# Altium PCB Copy of CFD_Chip_Test_v1_noLevelShifting.PcbDoc
Units mil, origin at the board's own origin, x right, y up, seen from the top; angles counter-clockwise.
Board outline 2960 x 2835 mil, 2 copper layers (Top Layer, Bottom Layer); 72 components, 49 nets, 279 pads, 82 vias.
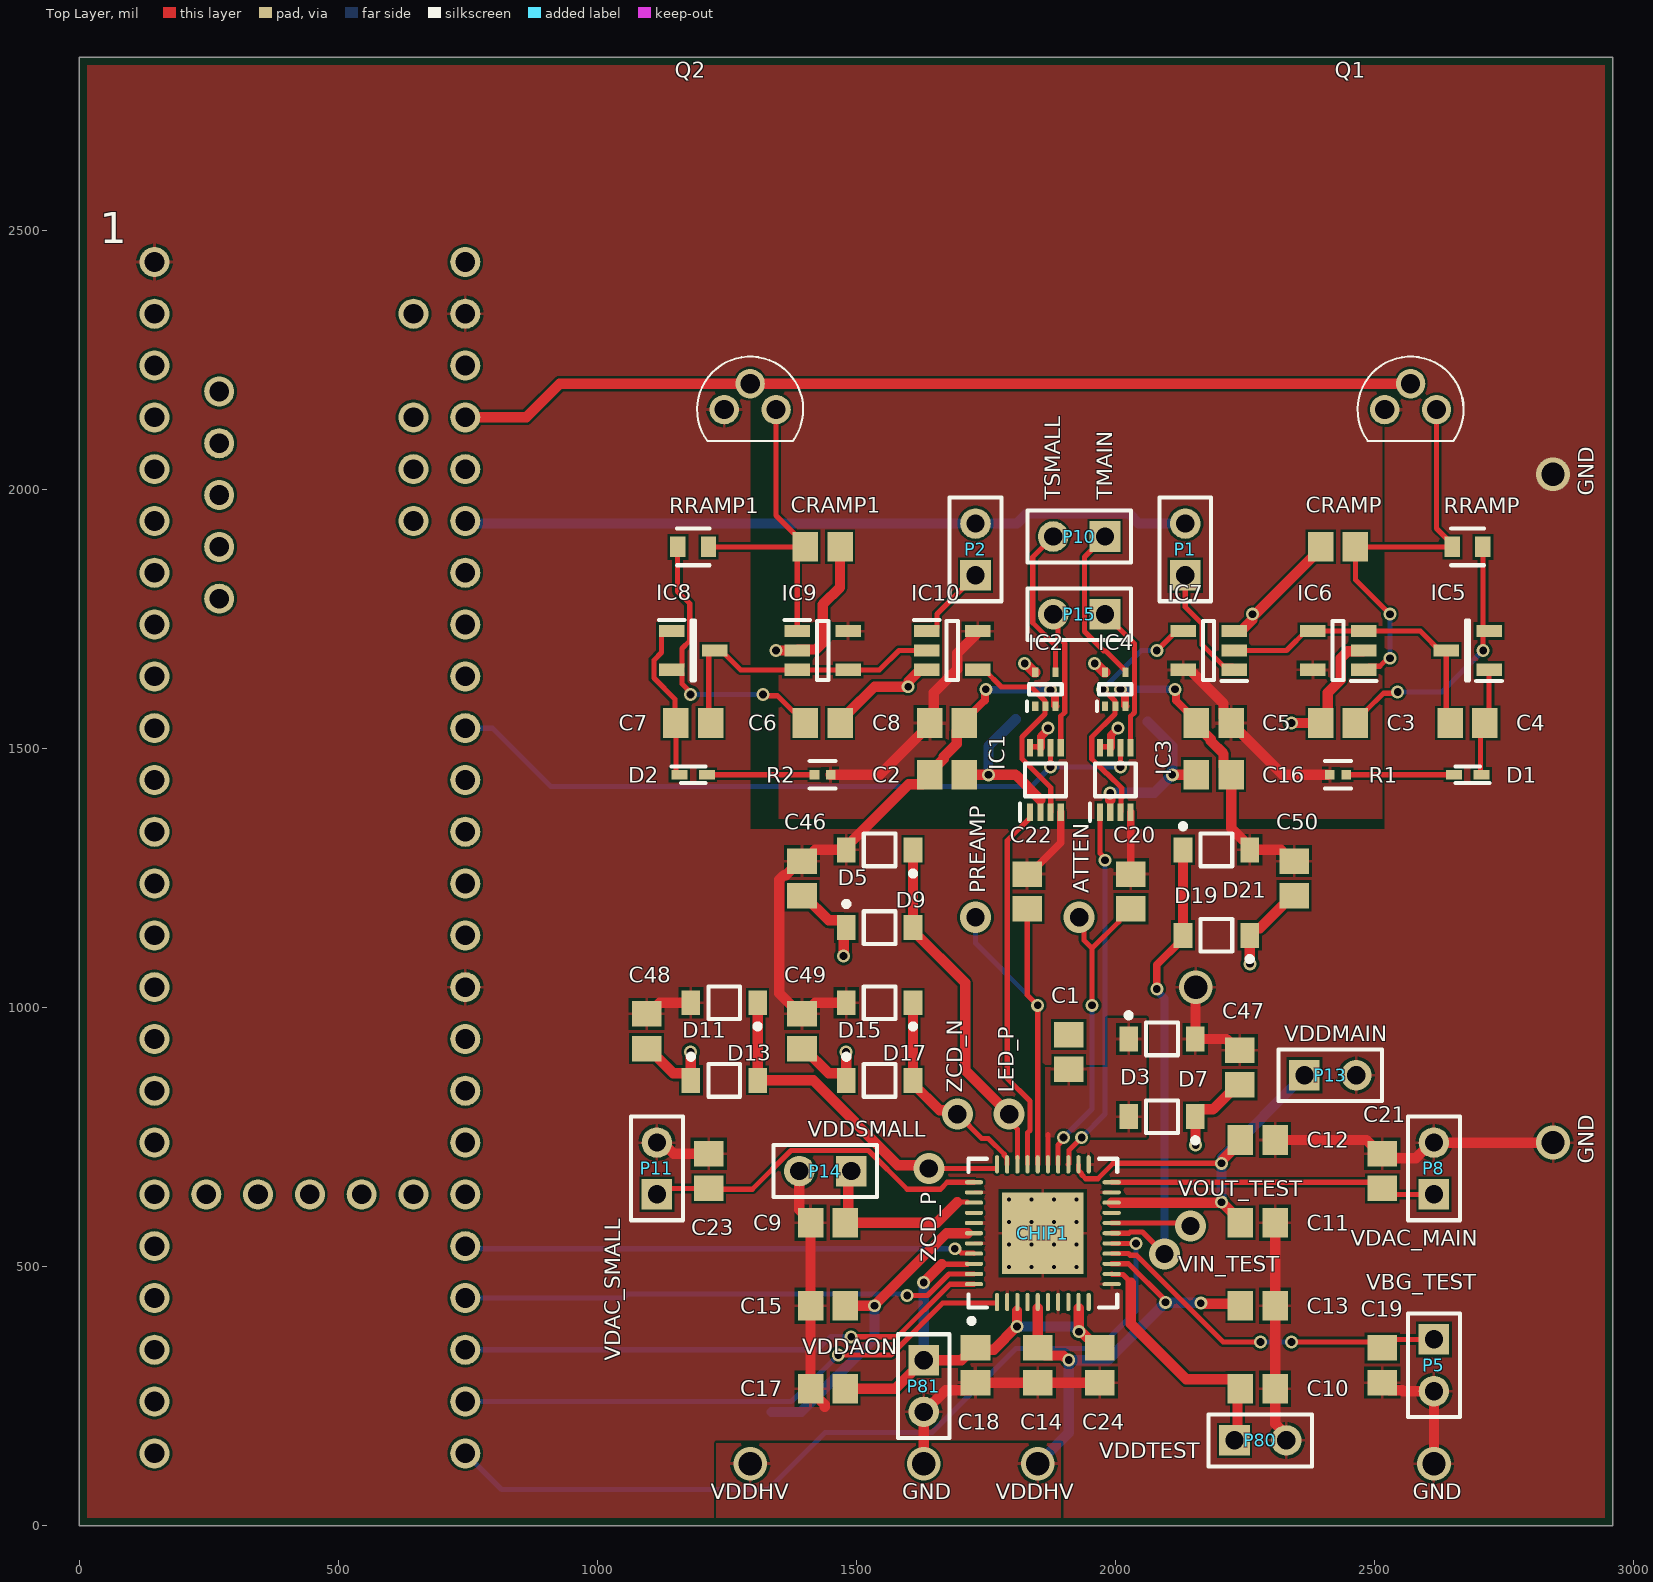
[diagram p0: Top Layer view]
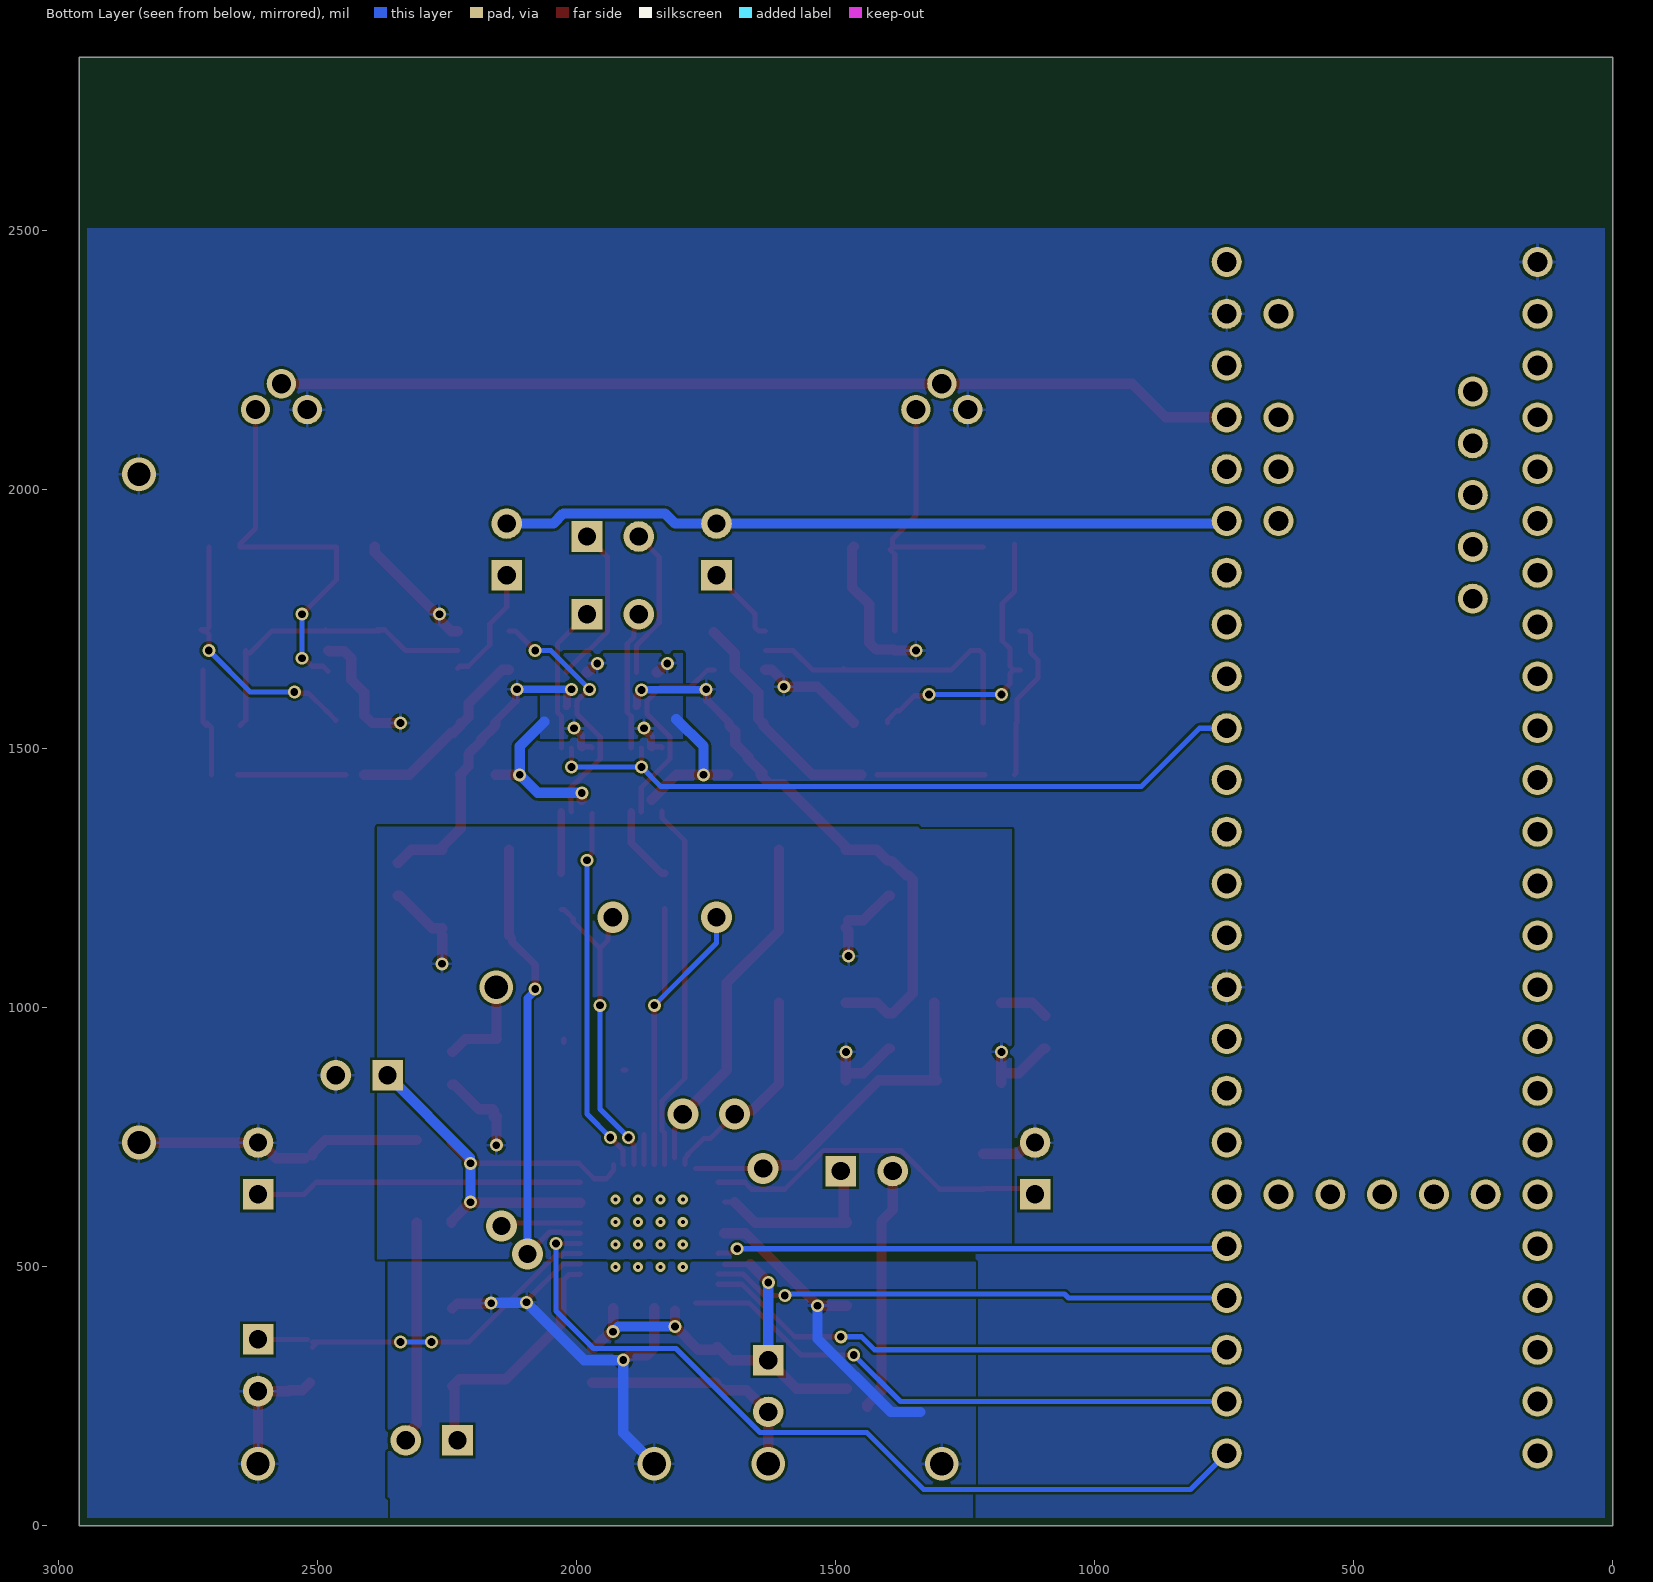
[diagram p1: Bottom Layer view, seen from below]

## Layer stack, top to bottom
Top Solder: solder mask 0.4, Solder Resist, Dk 3.5
Top Layer: signal copper 1.4
Dielectric 1: dielectric 12.6, FR-4, Dk 4.8
Bottom Layer: signal copper 1.4
Bottom Solder: solder mask 0.4, Solder Resist, Dk 3.5

## Board outline
0,0 2960,0 2960,2835 0,2835

## Design rules (kind name [scope] priority, off if disabled: settings)
AcuteAngle [All] p1: minimum=6.00000000000000E+0001 checktracksonly=FALSE
BoardOutlineClearance [All] p1: gap=15 ignorepadtopadclearanceinfootprint=FALSE
Clearance Clearance_outa_inner2 [InNamedPolygon('outa_inner2')] p1: gap=40 ignorepadtopadclearanceinfootprint=FALSE except(0: Arc-Hole Track-Hole SMDPad-Hole THPad-Hole Via-Hole Fill-Hole Poly-Hole Region-Hole Text-Hole)
Clearance Clearance_gnd_adc_vbus [InNamedPolygon('gnd_adc') vs InNet('VBUS')] p2: gap=60 ignorepadtopadclearanceinfootprint=FALSE except(0: Arc-Hole Track-Hole SMDPad-Hole THPad-Hole Via-Hole Fill-Hole Poly-Hole Region-Hole Text-Hole)
Clearance Clearance_gnd_adc [InNamedPolygon('gnd_adc')] p3: gap=20 ignorepadtopadclearanceinfootprint=FALSE except(0: Arc-Hole Track-Hole SMDPad-Hole THPad-Hole Via-Hole Fill-Hole Poly-Hole Region-Hole Text-Hole)
Clearance Clearance_dgnd [InNamedPolygon('dgnd')] p4: gap=15 ignorepadtopadclearanceinfootprint=FALSE except(0: Arc-Hole Track-Hole SMDPad-Hole THPad-Hole Via-Hole Fill-Hole Poly-Hole Region-Hole Text-Hole)
Clearance Clearance_vbus_keepout [InPolygon vs OnLayer('Keep-Out Layer')] p5: gap=20 ignorepadtopadclearanceinfootprint=FALSE except(0: Arc-Hole Track-Hole SMDPad-Hole THPad-Hole Via-Hole Fill-Hole Poly-Hole Region-Hole Text-Hole)
Clearance Clearance_vbus [InNamedPolygon('vbus')] p6: gap=60 ignorepadtopadclearanceinfootprint=FALSE except(0: Arc-Hole Track-Hole SMDPad-Hole THPad-Hole Via-Hole Fill-Hole Poly-Hole Region-Hole Text-Hole)
Clearance Clearance_gnd [InNamedPolygon('gnd')] p7: gap=10 ignorepadtopadclearanceinfootprint=FALSE except(0: Arc-Hole Track-Hole SMDPad-Hole THPad-Hole Via-Hole Fill-Hole Poly-Hole Region-Hole Text-Hole)
Clearance [All] p8: gap=5 ignorepadtopadclearanceinfootprint=FALSE except(0: Arc-Hole Track-Hole SMDPad-Hole THPad-Hole Via-Hole Fill-Hole Poly-Hole Region-Hole Text-Hole)
DiffPairsRouting [All] p1: maxlimit=25 minlimit=5 mostfreqgap=6 toplayer_minwidth=10 toplayer_maxwidth=15 toplayer_prefwidth=15 bottomlayer_minwidth=10 bottomlayer_maxwidth=15 bottomlayer_prefwidth=15 maxuncoupledlength=500
HoleSize [All] p1: absolutevalues=TRUE maxlimit=300 minlimit=10 maxpercent=80.000 minpercent=20.000
MinimumAnnularRing [All] p1: minimumring=5
MinimumSolderMaskSliver [All] p1: minsoldermaskwidth=4
PlaneConnect [All] p1: planeconnectstyle=Relief reliefexpansion=5 reliefentries=4 reliefconductorwidth=10 reliefairgap=10
PolygonConnect [All] p1: connectstyle=Relief reliefconductorwidth=6 reliefentries=4 polygonreliefangle="90 Angle" airgapwidth=6
RoutingVias [All] p1: holewidth=12 width=24 viastyle="Through Hole" minholewidth=10 minwidth=22 maxholewidth=200 maxwidth=200
SilkToSilkClearance [All] p1: silktosilkclearance=5
SilkToSolderMaskClearance [IsPad] p1: minsilkscreentomaskgap=3 clearancetoexposedcopper=FALSE
SolderMaskExpansion [All] p1: expansion=2.2 istentingtop=FALSE
Width [All] p1: maxlimit=1000 minlimit=5 preferedwidth=10 minimp=50.000000 maximp=50.000000 favimp=50.000000
24 further rules are at their usual default settings.

## Classes and differential pairs
component class TAC: C3 C4 C5 C6 C7 C8 CRAMP CRAMP1 D1 D2 IC5 IC6 IC7 IC8 IC9 IC10 P1 P2 Q1 Q2 R1 R2 RRAMP RRAMP1
component class Interface: 1 C1 C19 C20 C21 C22 C23 C46 C47 C48 C49 C50 D3 D5 D7 D9 D11 D13 D15 D17 D19 D21 P5 P8 P10 P11 P13 P14 P15 P80 P81
component class Chip: C2 C9 C10 C11 C12 C13 C14 C15 C16 C17 C18 C24 CHIP1 IC1 IC2 IC3 IC4

## Components (designator, comment, footprint, x,y, rotation, side; value= is the part's Value field where it differs from the comment)
1 "TEENSY_3.5/3.6" TEENSY_3.5/3.6 445,1340 r270 top
C1 "Value?" CAPC2013X140X45NL15T25 1910,915 r270 top
C2 ".01uF" CAPC2013X140X45NL15T25 1675,1450 r0 top
C3 ".1uF" CAPC2013X140X45NL15T25 2430,1550 r0 top
C4 "1uF" CAPC2013X140X45NL15T25 2680,1550 r0 top
C5 ".1uF" CAPC2013X140X45NL15T25 2190,1550 r0 top
C6 ".1uF" CAPC2013X140X45NL15T25 1435,1550 r180 top
C7 "1uF" CAPC2013X140X45NL15T25 1185,1550 r180 top
C8 ".1uF" CAPC2013X140X45NL15T25 1675,1550 r180 top
C9 ".01uF" CAPC2013X140X45NL15T25 1445,585 r0 top
C10 ".01uF" CAPC2013X140X45NL15T25 2275,265 r180 top
C11 ".01uF" CAPC2013X140X45NL15T25 2275,585 r180 top
C12 ".01uF" CAPC2013X140X45NL15T25 2275,745 r180 top
C13 ".01uF" CAPC2013X140X45NL15T25 2275,425 r180 top
C14 ".01uF" CAPC2013X140X45NL15T25 1850,310 r90 top
C15 ".01uF" CAPC2013X140X45NL15T25 1445,425 r0 top
C16 ".01uF" CAPC2013X140X45NL15T25 2190,1450 r180 top
C17 ".01uF" CAPC2013X140X45NL15T25 1445,265 r0 top
C18 ".01uF" CAPC2013X140X45NL15T25 1730,310 r90 top
C19 "Value?" CAPC2013X140X45NL15T25 2515,310 r90 top
C20 "Value?" CAPC2013X140X45NL15T25 2030,1225 r270 top
C21 "Value?" CAPC2013X140X45NL15T25 2515,685 r270 top
C22 "Value?" CAPC2013X140X45NL15T25 1830,1225 r270 top
C23 "Value?" CAPC2013X140X45NL15T25 1215,685 r270 top
C24 ".01uF" CAPC2013X140X45NL15T25 1970,310 r90 top
C46 ".01uF" CAPC2013X140X45NL15T25 1395,1250 r270 top
C47 ".01uF" CAPC2013X140X45NL15T25 2240,885 r270 top
C48 ".01uF" CAPC2013X140X45NL15T25 1095,955 r270 top
C49 ".01uF" CAPC2013X140X45NL15T25 1395,955 r270 top
C50 ".01uF" CAPC2013X140X45NL15T25 2345,1250 r270 top
CHIP1 "CFD" QFN50P700X700X80_HS-43N 1860,565 r90 top
CRAMP "" CAPC2013X140X45NL15T25 2430,1890 r0 top
CRAMP1 "" CAPC2013X140X45NL15T25 1435,1890 r180 top
D1 "1N4148WT" SODFL1608X70N 2680,1450 r180 top
D2 "1N4148WT" SODFL1608X70N 1185,1450 r0 top
D3 "" ONSC-SOD-123-2-425-04_V 2090,790 r180 top
D5 "" ONSC-SOD-123-2-425-04_V 1545,1155 r0 top
D7 "" ONSC-SOD-123-2-425-04_V 2090,940 r0 top
D9 "" ONSC-SOD-123-2-425-04_V 1545,1305 r180 top
D11 "" ONSC-SOD-123-2-425-04_V 1245,860 r0 top
D13 "" ONSC-SOD-123-2-425-04_V 1245,1010 r180 top
D15 "" ONSC-SOD-123-2-425-04_V 1545,860 r0 top
D17 "" ONSC-SOD-123-2-425-04_V 1545,1010 r180 top
D19 "" ONSC-SOD-123-2-425-04_V 2195,1140 r180 top
D21 "" ONSC-SOD-123-2-425-04_V 2195,1305 r0 top
IC1 "NL17SZ74USG" SOP50P310X90-8N 1865,1440 r90 top
IC2 "NL17SZ14XV5T2G" SOTFL50P160X60-5N 1865,1615 r90 top
IC3 "NL17SZ74USG" SOP50P310X90-8N 2000,1440 r90 top
IC4 "NL17SZ14XV5T2G" SOTFL50P160X60-5N 2000,1615 r90 top
IC5 "MAX6018BEUR18+T" SOT95P237X112-3N 2680,1690 r180 top
IC6 "MAX4490AUK+T" SOT95P280X145-5N 2430,1690 r180 top
IC7 "TMUX1101DBVR" SOT95P280X145-5N 2180,1690 r180 top
IC8 "MAX6018BEUR18+T" SOT95P237X112-3N 1185,1690 r0 top
IC9 "MAX4490AUK+T" SOT95P280X145-5N 1435,1690 r0 top
IC10 "TMUX1101DBVR" SOT95P280X145-5N 1685,1690 r0 top
P1 "Header 2" HDR1X2 2135,1835 r90 top
P2 "Header 2" HDR1X2 1730,1835 r90 top
P5 "Header 2" HDR1X2 2615,360 r270 top
P8 "Header 2" HDR1X2 2615,640 r90 top
P10 "Header 2" HDR1X2 1980,1910 r180 top
P11 "Header 2" HDR1X2 1115,640 r90 top
P13 "Header 2" HDR1X2 2365,870 r0 top
P14 "Header 2" HDR1X2 1490,685 r180 top
P15 "Header 2" HDR1X2 1980,1760 r180 top
P80 "Header 2" HDR1X2 2230,165 r0 top
P81 "Header 2" HDR1X2 1630,320 r270 top
Q1 "2N7000" TO-92_(TO-226) 2520,2155 r180 top
Q2 "2N7000" TO-92_(TO-226) 1245,2155 r180 top
R1 "470Ohm" FP-CRCW0402-e3-IPC_C 2430,1450 r180 top
R2 "470Ohm" FP-CRCW0402-e3-IPC_C 1435,1450 r0 top
RRAMP "" FP-CRCW0603-e3-MFG 2680,1890 r0 top
RRAMP1 "" FP-CRCW0603-e3-MFG 1185,1890 r180 top

## Footprints (in the part's own frame and the unit in brackets; to place one, negate y for a bottom-side part, rotate by r counter-clockwise, add the part's x,y. Pads: shape width x height; smd on the part's side, far side on the other; paste and mask are expansions set on the pad)
CAPC2013X140X45NL15T25 [mm] "Chip Capacitor, 2-Leads, Body 2.00x1.25mm, IPC Medium Density"
  rect 1.25x1.45 smd: 1(-0.85,0) 2(0.85,0)
  body extent -1.08,-0.7 1.07,0.7, height 1.4
FP-CRCW0402-e3-IPC_C [mil]
  rect 18.43x18.6 smd paste+0 mask+0: 1(-15.83,0) 2(15.83,0)
  silkscreen extent -25,-27 25,27, body extent -29,-15 29,15, height 10
FP-CRCW0603-e3-MFG [mm]
  rect 0.75x1 smd paste+0 mask+0: 1(-0.75,0) 2(0.75,0)
  silkscreen extent -0.8,-0.9 0.8,0.9, body extent -1.22,-0.6 1.22,0.6, height 0.25
HDR1X2 [mm] "Connector; Header; 2 Position"
  rect 1.5x1.5 hole 0.9: 1(0,0)
  round 1.5 hole 0.9: 2(2.54,0)
  silkscreen extent -1.27,-1.27 3.81,1.27
ONSC-SOD-123-2-425-04_V [mm] "SOD, 2-Leads, Body 2.69x1.6mm"
  rect 0.91x1.22 smd: 1(-1.635,0) 2(1.635,0)
  silkscreen extent -1.76,-0.8 0.78,1.28, body extent -1.35,-0.8 1.35,0.8, height 1.35
QFN50P700X700X80_HS-43N [mm] "QFN, 42-Leads, Body 7.00x7.00mm, Pitch 0.50mm, Thermal Pad 4.00x4.00mm, IPC Medium Density"
  oval 0.9x0.2 smd: 1(-3.375,2.25) 2(-3.375,1.75) 3(-3.375,1.25) 4(-3.375,0.75) 5(-3.375,0.25) 6(-3.375,-0.25) 7(-3.375,-0.75) 8(-3.375,-1.25) 9(-3.375,-1.75) 10(-3.375,-2.25) 22(3.375,-2.25) 23(3.375,-1.75) 24(3.375,-1.25) 25(3.375,-0.75) 26(3.375,-0.25) 27(3.375,0.25) 28(3.375,0.75) 29(3.375,1.25) 30(3.375,1.75) 31(3.375,2.25)
  oval 0.2x0.9 smd: 11(-2.5,-3.375) 12(-2,-3.375) 13(-1.5,-3.375) 14(-1,-3.375) 15(-0.5,-3.375) 16(0,-3.375) 17(0.5,-3.375) 18(1,-3.375) 19(1.5,-3.375) 20(2,-3.375) 21(2.5,-3.375) 32(2.5,3.375) 33(2,3.375) 34(1.5,3.375) 35(1,3.375) 36(0.5,3.375) 37(0,3.375) 38(-0.5,3.375) 39(-1,3.375) 40(-1.5,3.375) 41(-2,3.375) 42(-2.5,3.375)
  rect 4x4 smd: 43(0,0)
  silkscreen extent -4.42,-3.65 3.65,3.65, body extent -3.5,-3.5 3.5,3.5, height 0.8
SODFL1608X70N [mm]
  rect 0.78x0.47 smd: 1(-0.675,0) 2(0.675,0)
  silkscreen extent -1.06,-0.4 0.6,0.4, body extent -0.8,-0.4 0.8,0.4, height 0.7
SOP50P310X90-8N [mm]
  rect 0.85x0.3 smd: 1(-1.575,0.75) 2(-1.575,0.25) 3(-1.575,-0.25) 4(-1.575,-0.75) 5(1.575,-0.75) 6(1.575,-0.25) 7(1.575,0.25) 8(1.575,0.75)
  silkscreen extent -2,-1 0.8,1.25, body extent -1.55,-1 1.55,1, height 0.9
SOT95P237X112-3N [mm]
  rect 1.25x0.6 smd: 1(-1.05,0.95) 2(-1.05,-0.95) 3(1.05,0)
  silkscreen extent -1.68,-1.46 0.08,1.5, body extent -1.18,-1.46 1.18,1.46, height 1.12
SOT95P280X145-5N [mm]
  rect 1.25x0.6 smd: 1(-1.25,0.95) 2(-1.25,0) 3(-1.25,-0.95) 4(1.25,-0.95) 5(1.25,0.95)
  silkscreen extent -1.88,-1.45 0.28,1.5, body extent -1.4,-1.45 1.4,1.45, height 1.45
SOTFL50P160X60-5N [mm]
  rect 0.465x0.3 smd: 1(-0.832,0.5) 2(-0.832,0) 3(-0.832,-0.5) 4(0.832,-0.5) 5(0.832,0.5)
  silkscreen extent -1.06,-0.8 0.25,0.9, body extent -0.8,-0.8 0.8,0.8, height 0.6
TEENSY_3.5/3.6 [mil]
  round 58 / inner round 60 / far side round 58 hole 38: 0/RX(-1000,-300) 1/TX(-900,-300) 2(-800,-300) 3/CANTX(-700,-300) 3V3(300,-300) 3V3_2(700,-100) 3V3_LO(-900,300) 4/CANRX(-600,-300) 5(-500,-300) 6(-400,-300) 7(-300,-300) 8(-200,-300) 9/CS(-100,-300) 10/CS(0,-300) 11/MOSI(100,-300) 12/MISO(200,-300) 13/SCK(200,300) 14/A0(100,300) 15/A1(0,300) 16/A2(-100,300) 17/A3(-200,300) 18/A4/SDA(-300,300) 19/A5/SCL(-400,300) 20/A6(-500,300) 21/A7(-600,300) 21/DAC0(500,300) 22/A8(-700,300) 23/A9(-800,300) 24(400,-300) 25(500,-300) 26(600,-300) 27(700,-300) 28(800,-300) 29(900,-300) 30(1000,-300) 31/A12(1100,-300) 32/A13(1200,-300) 33/A14(1200,300) 34/A15(1100,300) 35/A16(1000,300) 36/A17(900,300) 37/A18(800,300) 38/A19(700,300) 39/A20(600,300) A10(-700,200) A11(-600,200) A22/DAC1(400,300) AGND(-1000,300) AREF(-800,200) GND(-1100,-300) GND2(300,300) GND3(700,0) PROG(700,100) RESET(700,200) U5V(-850,-175) UD+(-650,-175) UD-(-750,-175) UGND1(-550,-175) UGND2(-450,-175) VBAT(700,-200) VIN(-1100,300) VUSB(-1000,200)
TO-92_(TO-226) [mm]
  round 1.44 hole 0.94: 1(0,0) 2(-1.27,-1.27) 3(-2.54,0)
  silkscreen extent -3.87,-2.6 1.33,1.53, body extent -2.6,-15.62 2.6,5.33, height 1.59

## Part data
C1 C2 C3 C4 C5 C6 C7 C8 C9 C10 C11 C12 C13 C14 C15 C16 C17 C18 C19 C20 C21 C22 C23 C24 C46 C47 C48 C49 C50 CRAMP CRAMP1: library part CMP-2007-03395-1, "0402", Manufacturer=Murata, Part Number=GRM21BR71A106KE51L
D1 D2: "Diode", Manufacturer_Name=SEMTECH, Datasheet Link=https://datasheet.lcsc.com/szlcsc/Semtech-1N4148WT_C27748.pdf, Height=0.7mm, Manufacturer_Part_Number=1N4148WT
D3 D5 D7 D9 D11 D13 D15 D17 D19 D21: library part CMP-1060-00509-1, "Zener Voltage Regulator, 2-Pin SOD-123, Pb-Free, Tape and Reel", Manufacturer="On Semiconductor", PartNumber=MMSZ4679T1G, ComponentLink1Description="Manufacturer URL", ComponentLink1URL=http://www.onsemi.com/, ComponentLink2Description=Datasheet, ComponentLink2URL=http://www.onsemi.com/pub_link/Collateral/MMSZ4678T1-D.PDF, ComponentLink3Description="Package Specification", ComponentLink3URL=http://www.onsemi.com/pub_link/Collateral/425-04.PDF, DatasheetVersion="Rev. 9", Mounting Technology="Surface Mount", P Max (W)=0.5, PackageDescription="2-Pin SOD, Body 1.6 x 2.69 mm", PackageReference=SOD-123-2-425-04, PackageVersion="Rev. G, 10/2009", Packing="Tape and Reel", RoHS=Pb-Free, VZ Typ (V)=2
IC1 IC3: "Flip Flops 1.65-5.5V CMOS Single D-Type", Manufacturer_Name="ON Semiconductor", Datasheet Link=http://www.onsemi.com/pub/Collateral/NL17SZ74-D.PDF, Height=0.9mm, Manufacturer_Part_Number=NL17SZ74USG
IC2 IC4: "Integrated Circuit", Manufacturer_Name="ON Semiconductor", Mouser2 Part Number=863-NL17SZ14XV5T2G, Datasheet Link=https://componentsearchengine.com//NL17SZ14XV5T2G.pdf, Height=0.6mm, Manufacturer_Part_Number=NL17SZ14XV5T2G, Mouser2 Price/Stock=https://www.mouser.com/Search/Refine.aspx?Keyword=863-NL17SZ14XV5T2G
IC5 IC8: "Voltage References Precision, Micropower, 1.8V Supply, Low-Dropout, SOT23 Voltage Reference", Manufacturer_Name="Maxim Integrated", Datasheet Link=https://pdfserv.maximintegrated.com/en/ds/MAX6018-MAX6018B.pdf, Height=1.12mm, Manufacturer_Part_Number=MAX6018BEUR18+T
IC6 IC9: "Integrated Circuit", Manufacturer_Name="Maxim Integrated", Datasheet Link=https://pdfserv.maximintegrated.com/en/ds/MAX4490-MAX4492.pdf, Height=1.45mm, Manufacturer_Part_Number=MAX4490AUK+T
IC7 IC10: "Analog Switch ICs 3-pA on-state leakage current, 5-V, 1:1 (SPST), 1-channel precision switch (active low) 5-SOT-23 -40 to 125", Manufacturer_Name="Texas Instruments", Datasheet Link=https://www.ti.com/lit/ds/symlink/tmux1101.pdf?ts=1618527438207, Height=1.45mm, Manufacturer_Part_Number=TMUX1101DBVR
P1 P2 P5 P8 P10 P11 P13 P14 P15 P80 P81: "Header, 2-Pin", LatestRevisionDate=17-Jul-2002, LatestRevisionNote="Re-released for DXP Platform.", Publisher="Altium Limited"
Q1 Q2: "MOSFET (N-Channel)", Manufacturer_Name="ON Semiconductor", Mouser2 Part Number=512-2N7000, Datasheet Link=https://componentsearchengine.com//2N7000.pdf, Manufacturer_Part_Number=2N7000, Mouser2 Price/Stock=https://www.mouser.com/Search/Refine.aspx?Keyword=512-2N7000
R1 R2: library part CMP-2002-08122-2, "RES Thick Film, 0Ω, 0.063W, 0402", Case Code (Imperial)=0402, Case Code (Metric)=1005, Max Operating Temperature=155°C, Max Power Dissipation=63mW, Min Operating Temperature=-55°C, Package Quantity=1, Resistance=0mR, Temperature Coefficient=100ppm/°C, Tolerance=5%, Voltage Rating=50V, Case/Package=0402, Composition="Thick Film", Contact Plating=Tin, Depth=0.5mm, Features="Automotive AEC-Q200", Height=0.35mm, Lead Free="Lead Free", Length=1mm, Military Standard=Not, Mount="Surface Mount", Number of Terminations=2, Packaging="Tape and Reel", Power Rating=63mW, Radiation Hardening=No, Termination=SMD/SMT, Voltage Rating (DC)=50V, Weight=2.3E-05oz, Width=0.5mm
RRAMP RRAMP1: library part CMP-2000-03013-2, "RES Thick Film, 1MΩ, 1%, 0.1W, 100ppm/°C, 0603", Case Code (Imperial)=0603, Case Code (Metric)=1608, Max Operating Temperature=155°C, Max Power Dissipation=100mW, Min Operating Temperature=-55°C, Package Quantity=10, Resistance=1MR, Temperature Coefficient=100ppm/°C, Tolerance=1%, Voltage Rating=75V, Case/Package=0603, Composition="Thick Film", Contact Plating=Tin, Depth=0.85mm, Features="Automotive AEC-Q200", Height=0.45mm, Lead Free="Lead Free", Length=1.55mm, Military Standard=Not, Mount="Surface Mount", Number of Pins=2, Number of Terminations=2, Packaging="Tape and Reel", Power Rating=100mW, Radiation Hardening=No, Termination=SMD/SMT, Voltage Rating (DC)=75V, Weight=7.1E-05oz, Width=0.85mm
1: DeviceSetName=TEENSY_3.5/3.6, GateName_1=G$1, LibraryName=Teensy356, Package=TEENSY_3.5/3.6, SymbolName_1=TEENSY_3.5/3.6

## Via types
v1: diameter 25, hole 15, Top Layer to Bottom Layer, 52 vias
v2: diameter 19.68, hole 7.87, Top Layer to Bottom Layer, 16 vias
v3: diameter 65, hole 45, Top Layer to Bottom Layer, 7 vias
v4: diameter 60, hole 35.43, Top Layer to Bottom Layer, 7 vias

## Nets (pads, with @x,y where several pads share a name; then routed paths per layer and width w, separated by ;. In a path a pad name is that pad's centre, name@x,y a point inside that pad or via, vN(x,y) a via of type N, cw(c..) or ccw(c..) an arc to the next point about the centre after c; other vN are vias at no path point)
+1.8VA: C46.2 C47.2 C48.2 C49.2 C50.2 D3.1 D5.1 D11.1 D15.1 D19.1 | length 831.3
  Top Layer w20: C48.2 1098.94,921.54 1146.46,874.02 1172.72,874.02 1180,866.73 D11.1@1180,855 ; v1(1180,915) 1180.32,914.68 1180.32,860.31 D11.1 ; C49.2 1398.94,921.54 1446.46,874.02 1472.72,874.02 1480,866.73 D15.1@1480,865.47 ; C46.2 1398.94,1216.54 1446.46,1169.02 D5.1@1475.98,1169.02 ; v1(1475,1100) 1475.96,1100.96 1475.96,1150.33 D5.1 ; v1(1480,915) 1480.31,914.69 1480.31,860.32 D15.1 ; D3.1 2154.68,789.69 2154.68,735.32 v1(2155,735) ; D3.1@2160,790 2160,801.73 2162.28,804.02 2188.54,804.02 2236.06,851.54 C47.2 ; D19.1 2259.68,1139.69 2259.68,1085.32 v1(2260,1085) ; D19.1@2259.37,1154.02 2278.54,1154.02 2341.06,1216.54 C50.2
+1.8VD: C2.2 C16.2 IC1.2 IC1.7 IC1.8 IC2.5 IC3.2 IC3.7 IC3.8 IC4.5 | length 798.2
  Top Layer w10: IC1.8 1835.47,1503.35 1836.38,1504.25 1854.25,1504.25 IC1.7@1855,1505 ; IC3.8 1970.47,1503.35 1971.38,1504.25 1989.25,1504.25 IC3.7@1990,1505
  Top Layer w15: IC1.7 1856.44,1503.29 1856.44,1523.92 1870,1537.48 v1(1870,1540) ; IC3.7 1991.44,1503.29 1991.44,1526.44 v1(2005,1540)
  Top Layer w20: C2.2 v1(1755,1450) 1807.32,1450 1855.16,1402.16 ; v1(1825,1665) 1826.35,1665 1843.6,1647.76 IC2.5 ; v1(1960,1665) 1961.35,1665 1978.6,1647.76 IC4.5 ; v1(1990,1415) 1990.16,1414.84 1990.16,1402.16 ; v1(2110,1450) C16.2
  Bottom Layer w20: v1(1755,1450) 1755,1505 1807.5,1557.5 ; v1(1990,1415) 2075,1415 v1(2110,1450) 2110,1505 2062.5,1552.5
+5VD: C5.2 C8.2 IC6.5 IC7.5 IC9.5 IC10.5 R1.2 R2.2 | length 824.8
  Top Layer w20: R2.2 1545.47,1450 1640,1544.53 C8.2@1640,1550 ; C8.2 1649.36,1557.83 1649.36,1608.54 1694.61,1653.79 1694.61,1684.61 IC10.5@1735,1725 ; IC7.5 2143.58,1652.6 2208.86,1587.32 2208.86,1561.14 C5.2@2220,1550 ; C5.2 2223.46,1546.06 2238.07,1531.46 2242.01,1531.46 2323.46,1450 R1.2@2410,1450
/RST_TIME: 1.17/A3 IC1.6 IC3.6 | length 1396.3
  Top Layer w10: IC1.6 1874.92,1501.93 1874.92,1465.08 v1(1875,1465) ; IC3.6 2009.92,1501.93 2009.92,1465.08 v1(2010,1465)
  Bottom Layer w10: 1.17/A3 797.5,1540 910,1427.5 1837.5,1427.5 v1(1875,1465) v1@2005,1465
/SCAN_IN: 1.34/A15 CHIP1.1 | length 1103.7
  Top Layer w10: v1(1465,330) 1566.8,330 1666.8,430 CHIP1.1@1770,430
  Bottom Layer w10: 1.34/A15 1375,240 v1(1465,330)
/SCAN_LOAD: 1.35/A16 CHIP1.42 | length 1029.6
  Top Layer w10: v1(1490,365) 1579.09,365 1680.66,466.57 CHIP1.42
  Bottom Layer w10: 1.35/A16@750,340 1425,340 1450,365 v1(1490,365)
/SCAN_OUT: 1.37/A18 CHIP1.39 | length 981
  Top Layer w10: v1(1690,535) 1694.06,535 1702.37,526.69 1726.06,526.69 CHIP1.39
  Bottom Layer w10: 1.37/A18@750,535 v1(1690,535)
/TIME_MAIN: IC3.3 IC4.2 IC7.4 | length 494
  Top Layer w10: v1(1975,1615) 1976.76,1615 1999.09,1592.67 IC4.2@1999.09,1583.15 ; IC4.2 1999.09,1581.34 1999.09,1567.41 1954.57,1522.88 1954.57,1481.13 1982.97,1452.73 1984.09,1452.73 2012.5,1424.32 2012.5,1405.68 2010.75,1403.93 2010.75,1378.9 IC3.3 ; v1(2080,1690) 2080.59,1690 2117.99,1727.4 IC7.4
  Bottom Layer w10: v1(1975,1615) 2050,1690 v1(2080,1690)
/TIME_SMALL: IC1.3 IC2.2 IC10.4 | length 411.7
  Top Layer w10: IC10.4 1747.01,1652.6 1780.38,1619.23 1837.53,1619.23 1864.09,1592.67 1864.09,1580.91 1865,1580 1864.09,1579.09 1864.09,1567.41 1819.57,1522.88 1819.57,1481.13 1875.16,1425.54 1875.16,1378.31 IC1.3
GND: 1.AGND 1.GND 1.GND2 C2.1 C3.1 C5.1 C6.1 C8.1 C9.1 C10.1 C11.1 C12.1 C13.1 C14.1 C15.1 C16.1 C17.1 C18.1 C19.1 C20.1 C21.1 C22.1 C23.1 C24.1 C46.1 C47.1 C48.1 C49.1 C50.1 CHIP1.2 CHIP1.7 CHIP1.11 CHIP1.20 CHIP1.22 CHIP1.33 CHIP1.36 CHIP1.38 CHIP1.43 CRAMP1.1 CRAMP.1 D7.2 D9.2 D13.2 D17.2 D21.2 IC1.4 IC2.3 IC3.4 IC4.3 IC6.2 IC7.3 IC9.2 IC10.3 P5.2 P8.2 P11.2 P13.2 P14.2 P80.2 P81.2 Q1.1 Q2.1 | length 5543.4
  Top Layer w15: C8.1@1705,1545 1705,1550.47 1748.09,1593.56 1748.09,1613.09 v1(1750,1615) ; C22.1@1830,1260 1835.47,1260 1894.53,1319.06 IC1.4 ; v1(1874.84,1613.74) 1874.84,1611.03 1883.41,1602.47 1883.41,1583.52 IC2.3 ; v1(2010,1615) 2010,1612.29 2018.41,1603.89 2018.41,1583.52 IC4.3 ; IC3.4 2029.53,1260.47 C20.1@2030,1260 ; v1(2115,1615) 2116.91,1613.09 2116.91,1593.56 2160,1550.47 C5.1@2160,1545
  Top Layer w20: C48.1@1095,985 1095.47,985 1120.47,1010 D13.2 ; P11.2 1125.57,740 1147.1,718.46 C23.1 ; v1(1345,1690) IC9.2 1387.6,1691.81 1421.81,1691.81 1435,1705 1435,1778.8 1468.46,1812.26 1468.46,1886.54 CRAMP1.1@1465,1890 ; P14.2 1390,610.47 1410,590.47 C9.1@1410,590 ; C49.1@1390,990 1389.53,990 1351.46,1028.07 1351.46,1247.36 1360.24,1256.14 1363.74,1256.14 1391.06,1283.46 C46.1 ; C49.1@1395,990 1400.47,990 1420.47,1010 D17.2 ; C46.1@1400,1285 1400.47,1285 1420.47,1305 D9.2 1480.63,1311.1 1600.98,1431.46 1626.93,1431.46 1645,1449.53 C2.1@1645,1450 ; C9.1 C15.1 C17.1@1411.54,268.46 ; C17.1@1415,265 C17.1@1411.54,268.46 ; 1438.86,230.24 1438.86,233.74 1410,262.6 1410,265 1411.54,266.54 C17.1@1411.54,268.46 ; C6.1@1465,1550 1465,1550.47 1483.07,1568.54 1483.54,1568.54 1535,1620 v1(1600,1620) 1600.96,1620.96 1600.96,1630.56 1622.99,1652.6 IC10.3 ; v3(1630,120) P81.2 1630.33,220 1672.26,261.93 1716.93,261.93 C18.1@1720,265 ; C2.1 1641.54,1453.94 1668.86,1481.26 1668.86,1484.76 1693.86,1509.76 1693.86,1533.86 C8.1@1705,1545 ; C18.1@1730,275 1731.54,276.54 C14.1 C24.1 ; D7.2 2214.53,940 2239.53,915 C47.1@2240,915 ; D7.2@2155,945 2154.68,945.32 2154.68,1039.68 v3(2155,1040) ; C5.1 2156.54,1546.06 2183.86,1518.74 2183.86,1515.24 2208.86,1490.24 2208.86,1466.14 C16.1@2225,1450 ; C16.1 2223.46,1347.01 2260,1310.47 D21.2@2260,1310 ; IC7.3 2242.01,1727.4 2264.04,1749.44 2264.04,1759.04 v1(2265,1760) 2265.96,1760.96 2271.43,1760.96 2390,1879.53 CRAMP.1@2390,1890 ; D21.2 2319.53,1305 2344.53,1280 C50.1@2345,1280 ; C11.1 C13.1 C10.1 2308.46,197.1 2325,180.57 P80.2@2325,160 ; C12.1 2484.53,745 2510,719.53 C21.1@2510,715 ; v1(2340,1550) 2395,1550 2409.84,1564.84 2409.84,1608.54 2435,1633.7 2435,1675 2448.19,1688.19 2477.4,1688.19 IC6.2 ; C19.1 2529.61,261.93 2553.54,261.93 2555.47,260 P5.2 ; C21.1@2525,710 2580,710 2610,740 P8.2 v3(2845,740) ; v3(2615,120) 2615,255 P5.2@2620,260
  Bottom Layer w15: v1(1750,1615) 1750.63,1614.37 1874.21,1614.37 v1(1874.84,1613.74) ; v1(2010,1615) v1(2115,1615)
  other v3: 2845,2030
IIN: C1.1
IIN_COUPLE: C1.2 CHIP1.26 D3.2 D7.1 | length 69.4
  Top Layer w10: CHIP1.26 1869.84,754.84 1870,755 ; C1.2@1904.53,880 C1.2@1910,880 ; D7.1@2025,933.27 D7.1@2025,940
NetC3_2: C3.2 IC5.2 RRAMP.2 | length 519
  Top Layer w10: C3.2@2465,1555 2465,1555.47 2483.07,1573.54 2483.54,1573.54 2517.5,1607.5 2542.5,1607.5 v1(2545,1610) ; RRAMP.2 2709.53,1734.21 2713.74,1730 IC5.2@2725,1730 ; v1(2710,1690) 2710,1720.59 2716.81,1727.4 IC5.2
  Bottom Layer w10: v1(2545,1610) 2630,1610 v1(2710,1690)
NetC4_1: C4.1 IC5.3 IC6.3 IC6.4 IC7.2 | length 602.5
  Top Layer w10: IC7.2 2330.59,1690 2370.59,1730 IC6.4@2385,1730 ; IC6.4 IC6.3 IC6.3@2482.4,1727.4 ; IC6.3@2485,1730 IC6.3@2482.4,1727.4 ; IC5.3 IC5.3@2638.66,1685 ; IC5.3@2640,1685 IC5.3@2638.66,1685 ; C4.1@2650,1545 2638.66,1556.34 IC5.3@2638.66,1685 ; IC6.3@2482.4,1727.4 2588.46,1727.4 2630.87,1685 IC5.3@2638.66,1685
NetC4_2: C4.2 D1.1 IC5.1 | length 213.7
  Top Layer w10: D1.1@2705,1450 2705,1541.54 C4.2 ; C4.2@2715,1545 2721.34,1551.34 IC5.1
NetC6_2: C6.2 IC8.2 RRAMP1.2 | length 577.2
  Top Layer w10: IC8.2 IC8.2@1156.46,1652.6 ; RRAMP1.2@1155,1895 1155,1803.73 1178.27,1780.46 1178.27,1708.88 1163.27,1693.88 1163.27,1659.41 IC8.2@1156.46,1652.6 ; v1(1180,1605) 1180,1609.06 1163.27,1625.79 1163.27,1645.79 IC8.2@1156.46,1652.6 ; v1(1320,1605) 1322.5,1602.5 1347.5,1602.5 1376.46,1573.54 1381.93,1573.54 1400,1555.47 C6.2@1400,1550
  Bottom Layer w10: v1(1180,1605) v1(1320,1605)
NetC7_1: C7.1 IC8.3 IC9.3 IC9.4 IC10.2 | length 588.8
  Top Layer w10: C7.1@1215,1550 1215,1683.19 1221.81,1690 IC8.3 1239.13,1690 1276.54,1652.6 IC9.3 1482.6,1652.6 IC9.4@1485,1655 ; IC9.4 1544.7,1652.6 1582.11,1690 IC10.2@1635,1690
NetC7_2: C7.2 D2.1 IC8.1 | length 317.6
  Top Layer w10: IC8.1 1130.87,1727.4 1124.06,1720.59 1124.06,1686.12 1109.06,1671.12 1109.06,1636.65 1150,1595.7 C7.2@1150,1550 ; C7.2 1151.54,1453.46 D2.1@1155,1450
NetCHIP1_24: CHIP1.24 IC3.1 | length 710.6
  Top Layer w10: CHIP1.24 1910.28,698.94 1910.28,725.28 v1(1935,750) ; IC3.1@1970,1375 1970.47,1374.53 1970.47,1298.59 1980,1289.06 v1(1980,1285)
  Bottom Layer w10: v1(1935,750) 1980,795 v1(1980,1285)
NetCHIP1_28: CHIP1.28 IC1.1 | length 720.1
  Top Layer w10: CHIP1.28 1830.47,758.82 1835,763.34 1835,820 1791.46,863.54 1791.46,1323.15 1835,1366.69 IC1.1@1835,1380
NetCRAMP1_2: CRAMP1.2 IC9.1 Q2.3 RRAMP1.1 | length 615.5
  Top Layer w10: RRAMP1.1 CRAMP1.2@1390,1890 ; Q2.3 1345,1950.47 1390,1905.47 CRAMP1.2@1390,1895 ; IC9.1 1385.79,1875.79 CRAMP1.2@1395,1885
NetCRAMP_2: CRAMP.2 IC6.1 Q1.3 RRAMP.1 | length 766.9
  Top Layer w10: IC6.1@2480,1650 2489.41,1659.41 2510.35,1659.41 2525.94,1675 v1(2530,1675) ; v1(2530,1760) 2463.46,1826.54 CRAMP.2 2650,1890 2650,1895.39 2620,1925.39 Q1.3
  Bottom Layer w10: v1(2530,1675) v1(2530,1760)
NetD1_2: D1.2 R1.1 | length 209.2
  Top Layer w10: R1.1 D1.2 D1.2@2655,1450
NetD2_2: D2.2 R2.1 | length 208.4
  Top Layer w10: D2.2 R2.1 R2.1@1420,1450
NetIC7_1: IC7.1 P1.1 | length 228.9
  Top Layer w10: P1.1 2135,1773.75 2167.73,1741.02 2167.73,1700.92 2209.24,1659.41 2225.59,1659.41 IC7.1@2230,1655
NetIC10_1: IC10.1 P2.1 | length 154.1
  Top Layer w10: IC10.1 1648.58,1727.4 1655.39,1734.21 1655.39,1760.39 P2.1
RST_TEST: 1.33/A14 CHIP1.15 | length 1642.1
  Top Layer w10: CHIP1.15 1993.03,545.16 2039.84,545.16 v1(2040,545)
  Bottom Layer w10: 1.33/A14@750,140 750,135 815,70 1330,70 1440,180 1645.9,180 1808.4,342.5 1967.5,342.5 2040,415 v1(2040,545)
RST_TIME: 1.23/A9 Q1.2 Q2.2 | length 1851.9
  Top Layer w20: 1.23/A9 862.49,2140 927.49,2205 Q2.2 Q1.2
SCAN_CLK: 1.36/A17 CHIP1.41 | length 1003.6
  Top Layer w10: v1@1600,445 1600.35,444.65 1637.53,444.65 1679.14,486.26 CHIP1.41
  Bottom Layer w10: 1.36/A17 1050.46,440 1057.96,447.5 1597.5,447.5 v1@1600,445
  other v1: 1598.17,444.65
TIME_MAIN: IC3.5 P15.1 | length 277.8
  Top Layer w10: P15.1@1985,1755 2037.18,1702.82 2037.18,1570.54 2029.53,1562.89 IC3.5
TIME_MAIN_OUT: IC4.4 P10.1 | length 313.7
  Top Layer w10: P10.1 1940.47,1870.47 1940.47,1726.33 1977.68,1689.12 1981.57,1689.12 2019.68,1651 IC4.4
TIME_SMALL: IC1.5 P15.2 | length 270.4
  Top Layer w10: P15.2 1889.39,1750.61 1889.39,1715.93 1902.18,1703.13 1902.18,1570.54 1894.53,1562.89 IC1.5
TIME_SMALL_OUT: IC2.4 P10.2 | length 296.9
  Top Layer w10: P10.2 1840.47,1870.47 1840.47,1743.63 1884.68,1699.41 IC2.4
VBG_TEST: C19.2 CHIP1.14 P5.1 | length 696.9
  Top Layer w10: CHIP1.14 2025.59,525.63 2028.72,522.5 2040.68,522.5 2208.18,355 v1(2280,355) ; v1(2340,355) C19.2@2500,355 ; C19.2@2510,345 C19.2@2500,355 ; C19.2@2510,355 C19.2@2500,355 ; C19.2@2520,360 P5.1
  Bottom Layer w10: v1(2280,355) v1(2340,355)
VDAC_MAIN: C21.2 CHIP1.21 P8.1 | length 631.8
  Top Layer w10: CHIP1.21 2503.11,663.43 C21.2 2526.54,640 P8.1
VDAC_SMALL: C23.2 CHIP1.32 P11.1 | length 684.2
  Top Layer w10: P11.1 1126.54,651.54 C23.2 ; C23.2@1215,650 1299.1,650 1373.63,724.53 1523.67,724.53 1598.2,650 1662.21,650 1675.63,663.43 CHIP1.32
VDDAON: C17.2 C18.2 C24.2 CHIP1.3 CHIP1.9 CHIP1.40 P81.1 | length 888.4
  Top Layer w10: 1665,505 CHIP1.40@1714.41,505
  Top Layer w20: C17.2 1575,265 P81.1 1702.6,320 1727.6,345 C18.2@1730,345 ; v1(1630,470) 1665,505 ; C18.2 1733.46,340 1765,340 v1(1810,385) CHIP1.3@1810,415 ; CHIP1.9@1929.65,420 v1@1929.65,379.88 ; v1(1930,375) 1929.65,375.35 v1@1929.65,379.88 ; C24.2 1966.06,343.46 v1@1929.65,379.88
  Bottom Layer w20: P81.1 v1(1630,470) ; v1(1810,385) 1918.65,385 1928.65,375 v1(1930,375)
VDDHV: C13.2 C14.2 C15.2 CHIP1.5 CHIP1.13 CHIP1.37 | length 1506.8
  Top Layer w10: CHIP1.13 2025.59,505.94 2096.59,434.95 v1(2096.59,431.59)
  Top Layer w20: C15.2 v1@1534.04,425 ; v1@1534.52,425.48 1674.04,565 CHIP1.37@1715,565 ; CHIP1.5@1850,420 C14.2 1864.61,328.86 1899.79,328.86 1908.65,320 v1(1910,320) ; v1(2165,430) 2165.96,429.04 2230.96,429.04 C13.2@2240,420
  Bottom Layer w20: v3(1295,120) v3@1299.22,124.22 ; 1336.72,220 1393.89,220 1535,361.11 v1(1535,425) ; v3(1850,120) 1910,180 v1(1910,320) 1985,320 v1@2095,430 ; v1(2096.59,431.59) 2097.39,430.8 2164.2,430.8 v1(2165,430)
VDDMAIN: C11.2 C12.2 CHIP1.19 CHIP1.23 P13.1 | length 946
  Top Layer w10: CHIP1.23 1928.9,686.22 1934.65,680.47 1934.65,678.32 1942.81,670.16 1966.12,670.16 1995.96,700 v1(2205,700)
  Top Layer w20: CHIP1.19 v1@2204.06,624.06 ; v1(2205,625) 2205.47,625 2241.54,588.94 C11.2 ; v1(2205,700) 2205.96,700.96 2205.96,705.48 2241.54,741.06 C12.2
  Bottom Layer w20: v1(2205,625) v1(2205,700) 2205.96,700.96 2205.96,710.96 P13.1
VDDSMALL: C9.2 CHIP1.34 P14.1 | length 351.7
  Top Layer w10: 1695,625 CHIP1.34@1714.41,625
  Top Layer w20: C9.2 1484.23,585 1655,585 1695,625 ; C9.2@1480,590 1484.23,594.23 1484.23,679.23 P14.1
VDDTEST: C10.2 CHIP1.12 P80.1 | length 492.7
  Top Layer w10: CHIP1.12 1993.94,485.2 2014.8,485.2 2030,470
  Top Layer w20: 2030,470 2030,390 2136.93,283.07 2226.93,283.07 2240,270 2235.77,265.77 2235.77,170.77 P80.1
VIN_TEST: CHIP1.16 D19.2 D21.1 | length 920.9
  Top Layer w10: CHIP1.16 2026.21,565 2028.71,567.5 2052.5,567.5 v4(2095,525)
  Top Layer w15: v1@2080,1036.35 2080,1083.27 2125,1128.27 D19.2@2125,1135
  Top Layer w20: D19.2@2130,1140 2130.63,1140.63 D21.1
  Bottom Layer w15: v1(2080.03,1036.33) 2080.03,1033.62 2095,1018.65 v4(2095,525)
VINN_ZCD_SMALL: CHIP1.30 D15.2 D17.1 | length 415.5
  Top Layer w10: v4(1695,795) 1741.95,748.05 1754.73,748.05 1785.35,717.43 1785.35,715.28 1791.1,709.53 CHIP1.30
  Top Layer w20: D17.1 D15.2 1609.37,853.9 1660.61,802.65 1692.35,802.65 v4@1700,795
VINP_LED_SMALL: CHIP1.29 D5.2 D9.1 | length 672.8
  Top Layer w10: v4(1795,795) 1795,781.47 1810.79,765.68 CHIP1.29@1810.79,710.59 ; v4@1810,795 v4@1810.39,794.61
  Top Layer w20: D5.2 1609.37,1148.9 1710,1048.27 1710,880 v4(1795,795) ; D5.2@1609.37,1160.63 D9.1
VINP_ZCD_SMALL: CHIP1.31 D11.2 D13.1 | length 684.9
  Top Layer w10: v4(1640,690) CHIP1.31@1770,690
  Top Layer w20: D11.2@1305,860 1309.37,864.37 D13.1 ; D11.2 1416.48,860 1580,696.48 1628.52,696.48 v4@1640,685
VOUT_TEST: CHIP1.17 | length 154.5
  Top Layer w10: CHIP1.17 2139.37,584.69 v4(2145,579.06)
VREF_ATTEN: C20.2 CHIP1.25 | length 623.9
  Top Layer w10: CHIP1.25 1889.53,735.47 1900,745.94 v1(1900,750) ; v4(1930,1175) 1939.57,1165.43 1939.57,1130.43 1955,1115 ; v1(1955,1005) 1955,1115 ; C20.2@2030,1190 2024.53,1190 2006.46,1171.93 2006.46,1166.46 1955,1115
  Bottom Layer w10: v1(1900,750) 1955,805 v1(1955,1005)
VREF_PREAMP: C22.2 CHIP1.27 | length 719.7
  Top Layer w10: C22.2 1830,1025 1845.1,1009.9 1849.9,1009.9 v1@1850,1010 ; v1(1850,1005) 1850.08,1004.92 1850.08,697.95 CHIP1.27
  Bottom Layer w10: v4(1730,1175) 1730,1125 v1(1850,1005)
VTAC: 1.21/A7 P1.2 P2.2 | length 1396.2
  Bottom Layer w20: 1.21/A7@755,1935 P2.2 1810,1935 1829.53,1954.53 2025.47,1954.53 2045,1935 P1.2
pads on no net: 1.0/RX 1.1/TX 1.2 1.3/CANTX 1.3V3 1.3V3_2 1.3V3_LO 1.4/CANRX 1.5 1.6 1.7 1.8 1.9/CS 1.10/CS 1.11/MOSI 1.12/MISO 1.13/SCK 1.14/A0 1.15/A1 1.16/A2 1.18/A4/SDA 1.19/A5/SCL 1.20/A6 1.21/DAC0 1.22/A8 1.24 1.25 1.26 1.27 1.28 1.29 1.30 1.31/A12 1.32/A13 1.38/A19 1.39/A20 1.A10 1.A11 1.A22/DAC1 1.AREF 1.GND3 1.PROG 1.RESET 1.U5V 1.UD+ 1.UD- 1.UGND1 1.UGND2 1.VBAT 1.VIN 1.VUSB CHIP1.4 CHIP1.6 CHIP1.8 CHIP1.10 CHIP1.18 CHIP1.35 IC2.1 IC4.1
copper on no net:
  other v2: 1795.04,500.04 1838.35,500.04 1881.65,500.04 1924.96,500.04 1795.04,543.35 1838.35,543.35 1881.65,543.35 1924.96,543.35 1795.04,586.65 1838.35,586.65 1881.65,586.65 1924.96,586.65 1795.04,629.96 1838.35,629.96 1881.65,629.96 1924.96,629.96

## Polygon pours and split planes (outlines as drawn)
GND on Top Layer "GND_L01_P016" (solid, remove dead copper, pour order 16): 0,1345 0,2835 1295,2835 2960,2835 2960,2220 2960,1345 2520,1345 2520,2220 1295,2220 1295,1345
GND on Top Layer "GND_L01_P007" (solid, remove dead copper, pour order 7): 1235,165 1235,0 0,0 0,165 0,1345 2960,1345 2960,165 2960,0 1895,0 1895,165
VDDHV on Top Layer "VDDHV_L01_P015" (solid, remove dead copper, pour order 15): 1230,0 1230,165 1895,165 1895,0
+5VD on Top Layer "+5VD_L01_P011" (solid, remove dead copper, pour order 11): 1350,1365 1350,2190 2515,2190 2515,1365
IIN_COUPLE on Top Layer "IIN_COUPLE_L01_P000" (solid, remove dead copper, pour order 0): 1865,885 1985,885 1985,980 2060,980 2060,750 1865,750
GND on Bottom Layer "GND_L02_P013" (solid, pour order 13): 1230,1350 1230,0 0,0 0,1350 0,2505 2960,2505 2960,0 2365,0 2365,1350
VDDHV on Bottom Layer "VDDHV_L02_P014" (solid, remove dead copper, pour order 14): 1230,0 1230,510 2365,510 2365,0
+1.8VD on Bottom Layer "+1.8VD_L02_P004" (solid, remove dead copper, pour order 4): 1795,1520 1795,1685 2070,1685 2070,1520
+1.8VA on Bottom Layer "+1.8VA_L02_P008" (solid, remove dead copper, pour order 8): 1160,515 1160,1350 2385,1350 2385,515

## Silkscreen, mask and mechanical layers (free items; w line width, h text height)
Top Overlay:
  text "GND" at 2924,1989.03 h30 r90
  text "TSMALL" at 1894,1981 h30 r90
  text "TMAIN" at 1994,1981 h30 r90
  text "PREAMP" at 1749,1221 h30 r90
  text "ATTEN" at 1949,1221 h30 r90
  text "VDDMAIN" at 2326,936 h30
  text "ZCD_N" at 1704,836 h30 r90
  text "LED_P" at 1804,836 h30 r90
  text "VDDSMALL" at 1406,751 h30
  text "GND" at 2924,699.03 h30 r90
  text "VOUT_TEST" at 2121,636 h30
  text "VDAC_MAIN" at 2454.08,541 h30
  text "ZCD_P" at 1654,509.05 h30 r90
  text "VIN_TEST" at 2121,491 h30
  text "VBG_TEST" at 2484.07,456 h30
  text "VDDAON" at 1395.98,331 h30
  text "VDAC_SMALL" at 1044,319.09 h30 r90
  text "VDDTEST" at 1969.06,131 h30
  text "VDDHV" at 1219.05,51 h30
  text "GND" at 1589.03,51 h30
  text "VDDHV" at 1769.05,51 h30
  text "GND" at 2574.03,51 h30